# EAGLE board FX I2C MCU v1.1 (EAGLE 6.4)
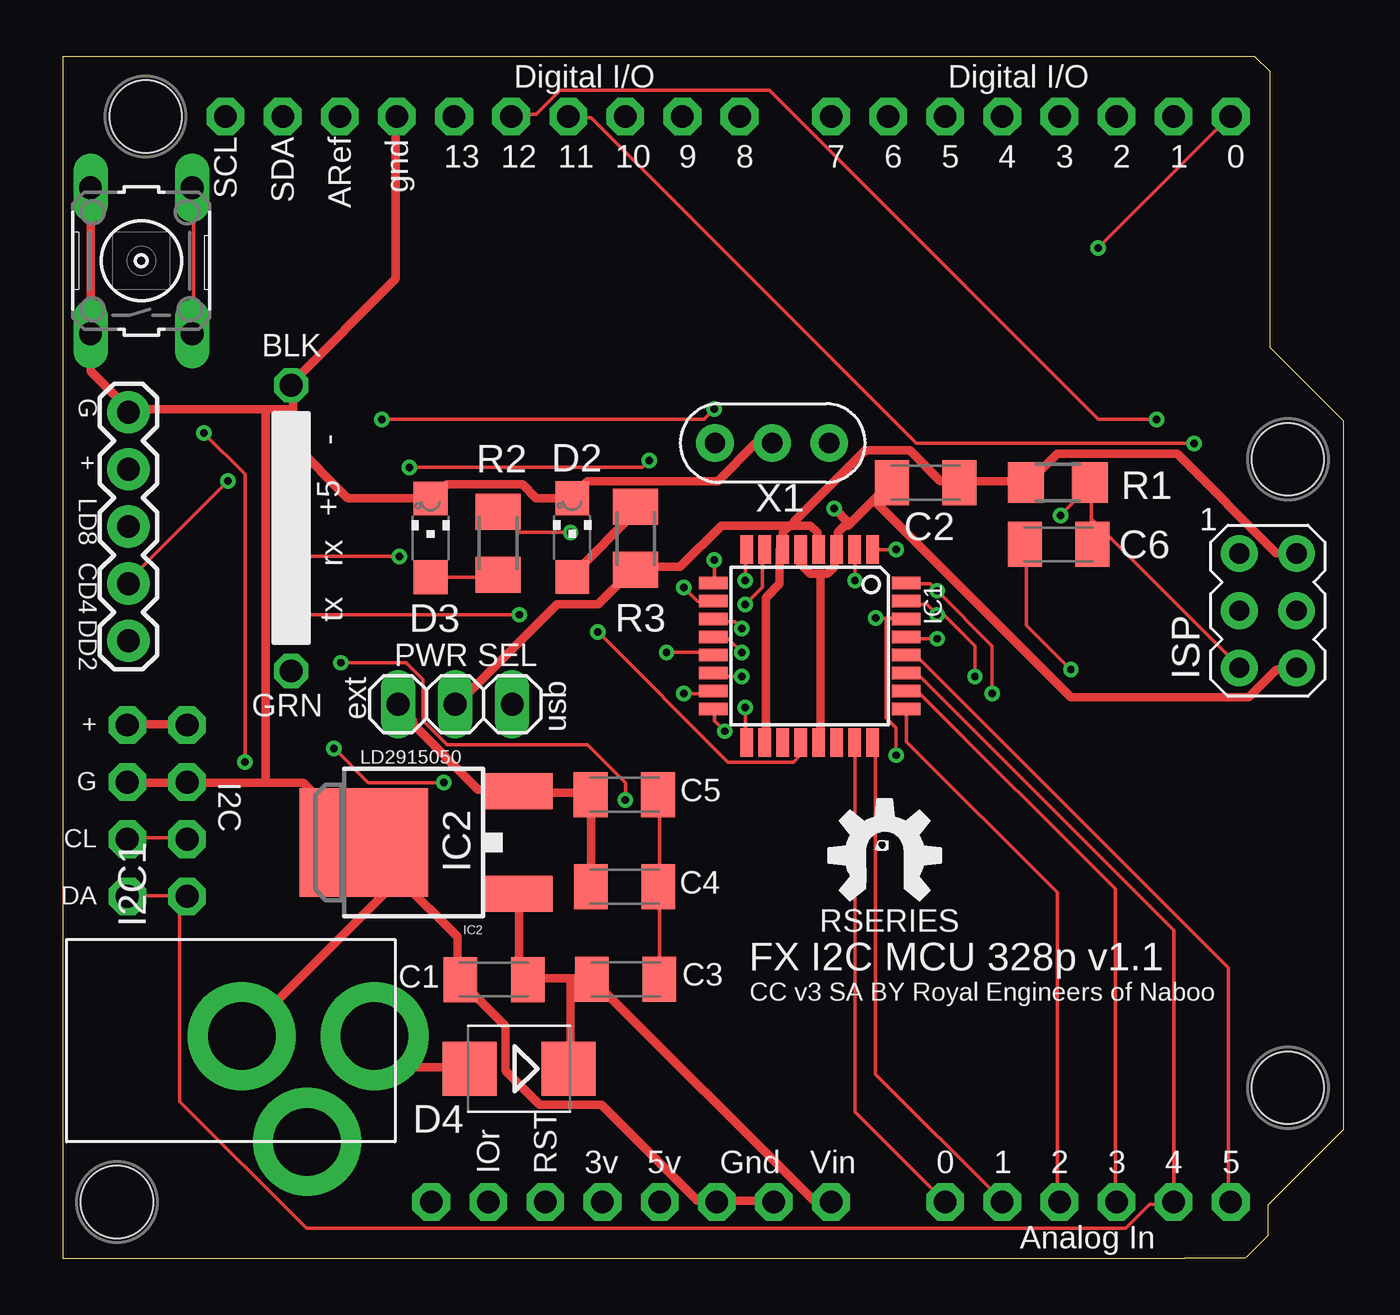
[diagram p0: board, top side]
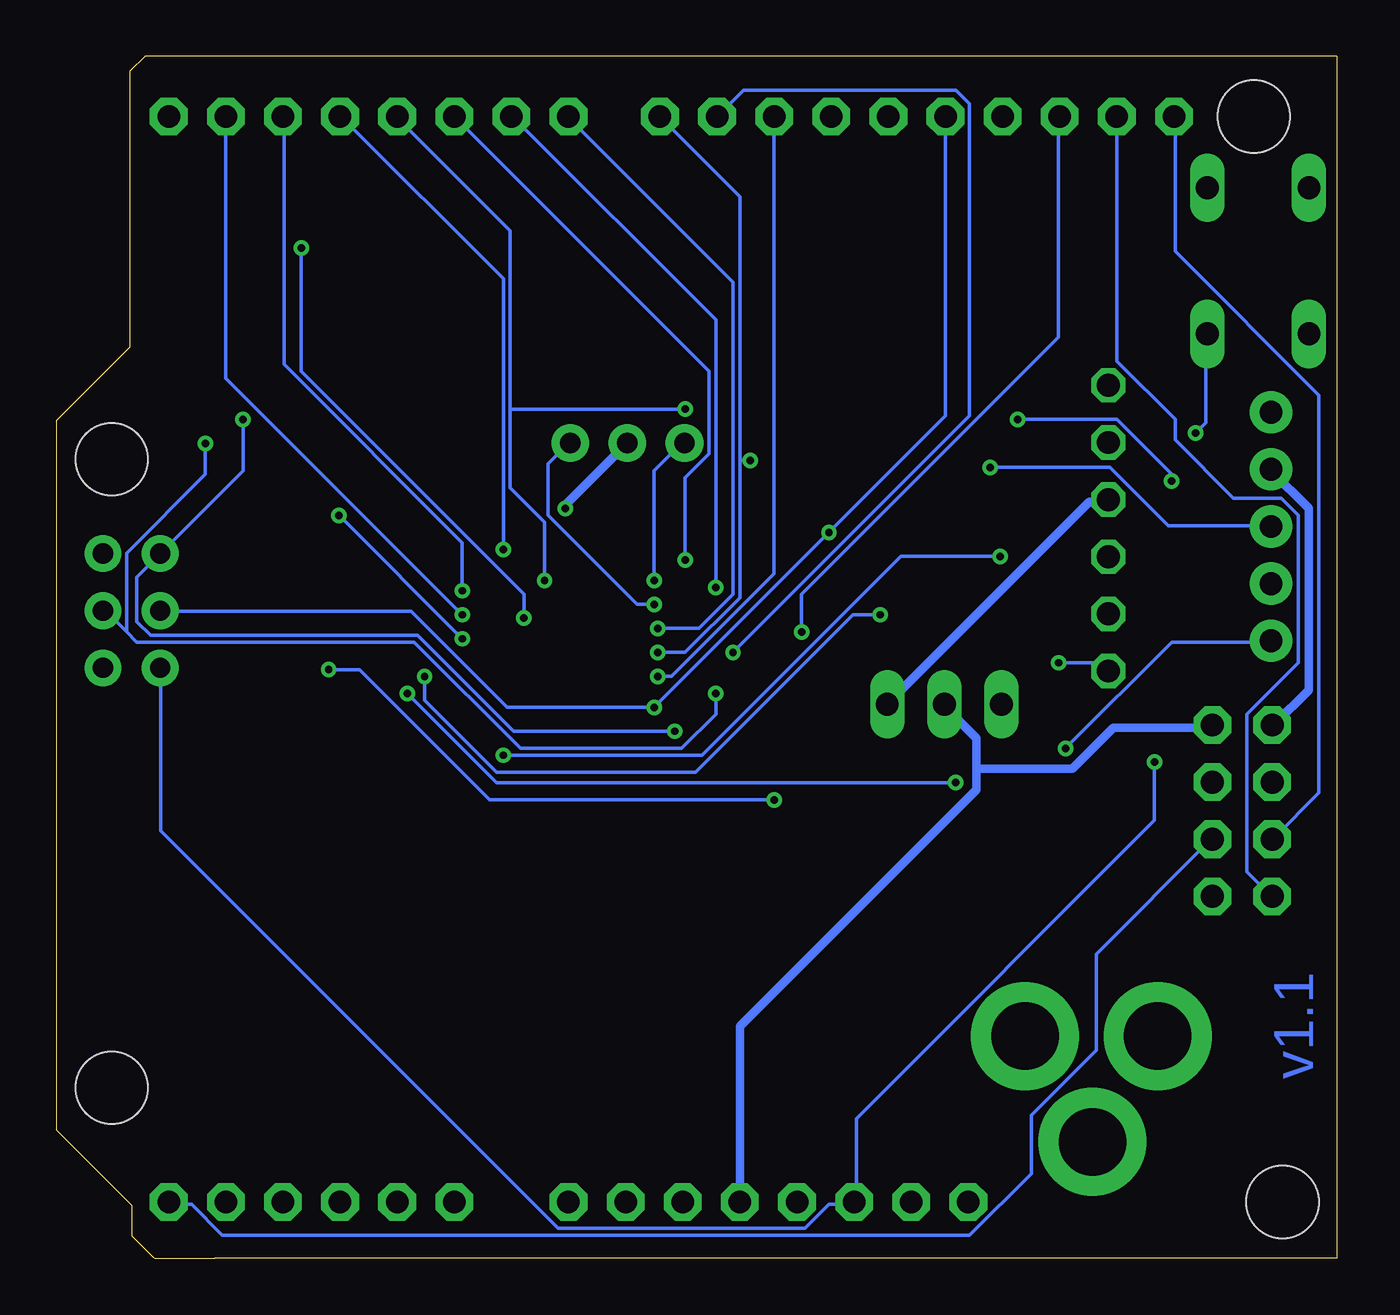
[diagram p1: board, bottom side, seen from below]

Size 56.94 x 53.44 mm. Coordinates in mm from the lower left corner, seen from the top.
Outline: 49.89,0 0,0 0,53.44 52.96,53.44
Outline: 52.95,53.44 52.99,53.44 53.66,52.77 53.66,40.51 56.94,37.24 56.94,5.73 53.58,2.36 53.58,1 52.62,0.05 52.57,0 49.89,0
Copper layers (1*16): Top 0.0356mm / dielectric 1.5011mm / Bottom 0.0356mm
Design rules "LaenPCBOrder": minimum track width 6mil, minimum drill 13mil, track to track 6mil, track to pad 6mil, pad to pad 6mil, via to via 12mil, smd to smd 6mil, copper to edge 15mil, drill to drill 6mil, minimum pad ring 7mil, minimum via ring 7mil, stop-mask expansion 4mil, vias tented up to drill 0mil, thermal gap 10mil
Net classes: 1 supply: width 0.381 mm, drill 0.152 mm, clearance 0.152 mm
Holes 3.2 mm at 3.68,50.76 54.48,35.52 54.48,7.58 2.41,2.5

## Footprints (pad centres in the part's own frame; a part is rotated, then mirrored left to right if it is on the bottom)
C1206K = smd 1.5 x 2: 1 -1.5,0; 2 1.5,0
CHIPLED_1206 = smd 1.5 x 1.5: A 0,-1.75; C 0,1.75
SMB = smd 2.4 x 2.4: A 2.2,0; C -2.2,0
1X04-CB = drill 1.016 pad 1.676 octagon: 1 -3.81,0; 2 -1.27,0; 3 1.27,0; 4 3.81,0
TQFP32-08 = smd 1.27 x 0.559: 1 -4.293,2.8; 2 -4.293,2; 3 -4.293,1.2; 4 -4.293,0.4; 5 -4.293,-0.4; 6 -4.293,-1.2; 7 -4.293,-2; 8 -4.293,-2.8; 17 4.293,-2.8; 18 4.293,-2; 19 4.293,-1.2; 20 4.293,-0.4; 21 4.293,0.4; 22 4.293,1.2; 23 4.293,2; 24 4.293,2.8 | smd 0.559 x 1.27: 9 -2.8,-4.293; 10 -2,-4.293; 11 -1.2,-4.293; 12 -0.4,-4.293; 13 0.4,-4.293; 14 1.2,-4.293; 15 2,-4.293; 16 2.8,-4.293; 25 2.8,4.293; 26 2,4.293; 27 1.2,4.293; 28 0.4,4.293; 29 -0.4,4.293; 30 -1.2,4.293; 31 -2,4.293; 32 -2.8,4.293
DPAK = smd 1.6 x 3: 1 -2.28,-5.31; 3 2.28,-5.31 | smd 4.826 x 5.715: 4 0,1.588
AVRISP = drill 0.9 pad 1.626: 1 -1.27,2.54; 2 1.27,2.54; 3 -1.27,0; 4 1.27,0; 5 -1.27,-2.54; 6 1.27,-2.54
PJ-102A = drill 3 pad 4.8: RING 0.1,-3.39; RING_SW -4.6,-6.29; TIP 0.1,-9.29
1X06-CLEAN = drill 1.016 octagon: 1 -6.35,0; 2 -3.81,0; 3 -1.27,0; 4 1.27,0; 5 3.81,0; 6 6.35,0
1X03 = drill 1.016 long: 1 -2.54,0; 2 0,0; 3 2.54,0
R1206 = smd 1.6 x 1.803: 1 -1.422,0; 2 1.422,0
M1206 = smd 1.6 x 2: 1 -1.4,0; 2 1.4,0
B3F-10XX = drill 1.016 long: 1 -3.251,2.261; 2 3.251,2.261; 3 -3.251,-2.261; 4 3.251,-2.261
1X05 = drill 1.016 pad 1.88: 1 0,0; 2 2.54,0; 3 5.08,0; 4 7.62,0; 5 10.16,0
ARDUINOR3-PINSONLY = drill 1 pad 1.676 octagon: 3V 36.83,3.81; 5V 39.37,3.81; A0 52.07,3.81; A1 54.61,3.81; A2 57.15,3.81; A3 59.69,3.81; A4 62.23,3.81; A5 64.77,3.81; AREF 25.146,52.07; D0 64.77,52.07; D1 62.23,52.07; D2 59.69,52.07; D3 57.15,52.07; D4 54.61,52.07; D5 52.07,52.07; D6 49.53,52.07; D7 46.99,52.07; D8 42.926,52.07; D9 40.386,52.07; D10 37.846,52.07; D11 35.306,52.07; D12 32.766,52.07; D13 30.226,52.07; GND 27.686,52.07; GND1 44.45,3.81; GND2 41.91,3.81; IOREF 31.75,3.81; RESERVED 29.21,3.81; RESET 34.29,3.81; SCL 20.066,52.07; SDA 22.606,52.07; VIN 46.99,3.81
CERM_OSC = drill 0.9 pad 1.676: P$1 -2.54,0; P$2 0,0; P$3 2.54,0

## Placement (x,y rotation side)
C1  0.1uF  [C1206K]  19.17,12.4 180 top
C2  0.1uF  [C1206K]  38.37,34.48 180 top
C3  10uf 25V  [C1206K]  25.03,12.41 0 top
C4  10uf 25V  [C1206K]  24.98,16.52 0 top
C5  0.1uF  [C1206K]  24.96,20.61 0 top
C6  0.1uF  [C1206K]  44.28,31.74 0 top
D2  [CHIPLED_1206]  22.65,32.04 0 top
D3  Green  [CHIPLED_1206]  16.35,32.03 0 top
D4  [SMB]  20.29,8.43 180 top
I2C  [1X04-CB]  2.87,19.9 90 top
I2C1  [1X04-CB]  5.52,19.9 90 top
IC1  MEGA48/88/168-AU  [TQFP32-08]  33.21,27.22 270 top
IC2  LM2931_FIXED  [DPAK]  14.97,18.49 90 top
ISP  AVRISP-6  [AVRISP]  53.59,28.79 0 top
J2  2.1MMJACK  [PJ-102A]  4.57,9.78 90 top
JP7  [1X06-CLEAN]  10.16,32.46 270 top
PWR_SEL  [1X03]  17.44,24.64 0 top
R1  10K  [R1206]  44.25,34.49 0 top
R2  1.0 K  [M1206]  19.35,31.8 270 top
R3  1.0 K  [M1206]  25.47,32 90 top
S1  RESET  [B3F-10XX]  3.49,44.35 90 top
TEECES  [1X05]  2.92,27.46 90 top
U1  ARDUINOR3PINSONLY  [ARDUINOR3-PINSONLY]  -12.83,-1.31 0 top
U$2  RSERIES-OSHW-LOGOMEDIUM  [RSERIES-OSHW-LOGO-MEDIUM]  36.45,17.96 0 top
X1  16.00MHz  [CERM_OSC]  31.54,36.25 180 top

## Library data of the parts
C1 C2 C5 C6 D2 D3 J2 R2 R3 = minimidi
C3 C4 = rcl
D4 = diode
I2C I2C1 JP7 = carduino
IC1 = avr-7
IC2 = SparkFun-PowerIC
ISP = adafruit
PWR_SEL = pinhead
R1 = rcl-ez
S1 = switch-omron
TEECES = SparkFun-Connectors
U1 U$2 = rseries
X1 = digg

## Nets
+5V [supply]: C2.1 I2C1.4 I2C.4 IC1.4 IC1.6 IC1.18 ISP.2 PWR_SEL.2 R1.1 R3.1 TEECES.4 U1.5V
+9V [supply]: C1.1 C3.1 D4.C IC2.1 U1.VIN
ANALOG0: IC1.23 U1.A0
ANALOG1: IC1.24 U1.A1
ANALOG2: IC1.25 U1.A2
ANALOG3: IC1.26 U1.A3
ANALOG4: I2C1.1 I2C.1 IC1.27 U1.A4 U1.SDA
ANALOG5: I2C1.2 I2C.2 IC1.28 U1.A5 U1.SCL
AREF: IC1.20 U1.AREF
DIGITAL2: IC1.32 TEECES.1 U1.D2
DIGITAL3: IC1.1 U1.D3
DIGITAL4: IC1.2 TEECES.2 U1.D4
DIGITAL5: IC1.9 U1.D5
DIGITAL6: IC1.10 U1.D6
DIGITAL7: IC1.11 U1.D7
DIGITAL8: IC1.12 TEECES.3 U1.D8
DIGITAL9: IC1.13 U1.D9
DIGITAL10: IC1.14 U1.D10
GND [supply]: C1.2 C2.2 D2.C D3.C I2C1.3 I2C.3 IC1.3 IC1.5 IC1.21 IC2.4 ISP.6 J2.RING JP7.1 JP7.2 S1.1 S1.2 TEECES.5 U1.GND U1.GND1 U1.GND2 X1.P$2
MISO: IC1.16 ISP.1 U1.D12
MOSI: IC1.15 ISP.4 U1.D11
N$1: IC1.7 X1.P$1
N$2: IC1.8 X1.P$3
N$3 [supply]: D2.A R3.2
N$4: D3.A R2.2
N$5: U1.RESERVED
N$6 [supply]: D4.A J2.TIP
N$7: U1.IOREF
N$8: C3.2 C4.2 C5.2
N$9 [supply]: C4.1 C5.1 IC2.3 PWR_SEL.1
N$11: U1.3V
RST: C6.2 IC1.29 ISP.5 R1.2 S1.3 S1.4 U1.RESET
RTS#: C6.1 JP7.6
RXD: IC1.30 JP7.4 U1.D0
SCK: IC1.17 ISP.3 R2.1 U1.D13
TXD: IC1.31 JP7.5 U1.D1
USB_5V [supply]: JP7.3 PWR_SEL.3

## Tracks (layer width: path | path; a pad name or v marks a point on that pad's centre or on a via)
+5V
  Top 0.381: I2C.4 2.92,23.74 5.51,23.74 I2C1.4 | IC1.18 31.26,22.97 31.26,29.38 31.87,29.98 31.87,31.51 IC1.6 32.02,31.66 32.02,32.27 32.33,32.58 | 32.33,32.58 32.48,32.58 | 32.48,32.58 33.24,32.58 33.55,32.27 33.55,31.51 IC1.4 | 32.33,32.58 32.18,32.58 29.28,32.58 27.45,30.75 25.47,30.75 R3.1 25.32,30.59 23.79,29.07 21.97,29.07 17.55,24.65 PWR_SEL.2 | 32.48,32.58 32.48,32.73 35.68,35.93 37.66,35.93 39.04,34.56 39.8,34.56 C2.1 39.95,34.56 42.69,34.56 R1.1 43,34.56 44.22,35.78 49.55,35.78 53.97,31.36 54.73,31.36 ISP.2
  Bottom 0.381: TEECES.4 2.92,35.01 1.24,33.34 1.24,25.26 2.76,23.74 I2C.4 | 16.02,21.75 16.02,23.13 17.39,24.5 PWR_SEL.2 | 16.02,21.75 16.02,20.84 26.54,10.32 26.54,2.55 U1.5V | I2C1.4 5.66,23.58 9.93,23.58 11.76,21.75 15.87,21.75 16.02,21.75
+9V
  Top 0.381: 22.58,12.46 23.49,12.46 C3.1 23.64,12.31 33.4,2.55 34.16,2.55 U1.VIN | 22.58,12.46 20.75,12.46 C1.1 20.75,12.61 20.29,13.07 20.29,16.12 IC2.1 | D4.C 22.58,8.5 22.58,12.31 22.58,12.46
ANALOG0
  Top 0.152: IC1.23 35.23,22.82 35.23,6.51 39.19,2.55 U1.A0
ANALOG1
  Top 0.152: IC1.24 36.14,22.82 36.14,8.19 41.78,2.55 U1.A1
ANALOG2
  Top 0.152: IC1.25 37.51,24.35 37.51,22.97 44.22,16.27 44.22,2.55 U1.A2
ANALOG3
  Top 0.152: IC1.26 37.51,25.11 38.12,25.11 46.81,16.42 46.81,2.55 U1.A3
ANALOG4
  Top 0.152: IC1.27 37.51,25.87 38.12,25.87 49.4,14.59 49.4,2.55 U1.A4 49.4,2.4 48.33,2.4 47.26,1.33 10.84,1.33 5.2,6.97 5.2,16.12 | 5.2,16.12 5.51,16.12 I2C1.1 5.2,16.12 | 5.2,16.12 2.92,16.12 I2C.1
  Bottom 0.152: U1.SDA 9.77,50.71 9.77,39.89 7.18,37.3 7.18,36.39 4.59,33.8 2.46,33.8 1.7,33.03 1.7,26.48 3.98,24.19 3.98,17.18 2.92,16.12 I2C.1
ANALOG5
  Top 0.152: IC1.28 37.51,26.78 37.97,26.78 51.84,12.92 51.84,2.55 U1.A5 | I2C.2 2.92,18.71 5.51,18.71 I2C1.2
  Bottom 0.152: U1.SCL 7.18,50.71 7.18,44.77 0.78,38.37 0.78,20.69 2.76,18.71 I2C.2 | U1.A5 51.84,2.4 50.92,2.4 49.55,1.03 16.33,1.03 13.58,3.77 13.58,6.36 10.69,9.26 10.69,13.53 5.66,18.55 I2C1.2
AREF  (via drill 0.33)
  Top 0.152: v23.79,27.85 29.59,22.06 32.48,22.06 32.79,22.36 32.79,22.82 IC1.20
  Bottom 0.152: v23.79,27.85 23.79,29.53 12.37,40.96 12.37,50.71 U1.AREF
DIGITAL2  (via drill 0.33)
  Top 0.152: IC1.32 37.51,29.98 38.58,29.98 v38.88,29.68 41.32,27.24 v41.32,25.11 | v12.06,22.67 13.58,21.15 v16.94,21.15
  Bottom 0.152: v38.88,29.68 38.88,31.81 46.81,39.74 46.81,50.71 U1.D2 | v12.06,22.67 7.34,27.39 2.92,27.39 TEECES.1 | v16.94,21.15 37.36,21.15 v41.32,25.11
DIGITAL3  (via drill 0.33)
  Top 0.152: v37.05,31.51 36.14,31.51 IC1.1
  Bottom 0.152: v37.05,31.51 37.05,43.55 44.22,50.71 U1.D3
DIGITAL4  (via drill 0.33)
  Top 0.152: v35.23,30.14 35.23,31.51 IC1.2 | v7.34,34.56 2.92,30.14 TEECES.2 | v14.19,37.3 28.52,37.3 v28.98,37.76
  Bottom 0.152: v35.23,30.14 35.23,32.73 36.75,34.25 36.75,37.76 | 36.75,37.76 36.75,45.68 41.78,50.71 U1.D4 | v7.34,34.56 7.34,34.86 9.77,37.3 v14.19,37.3 | 36.75,37.76 v28.98,37.76
DIGITAL5  (via drill 0.33)
  Top 0.152: v28.98,31.05 28.98,30.14 IC1.9
  Bottom 0.152: v28.98,31.05 28.98,34.71 27.91,35.78 27.91,39.43 39.19,50.71 U1.D5
DIGITAL6  (via drill 0.33)
  Top 0.152: v27.6,29.83 28.21,29.22 28.82,29.22 IC1.10
  Bottom 0.152: v27.6,29.83 27.6,41.72 36.6,50.71 U1.D6
DIGITAL7  (via drill 0.33)
  Top 0.152: v30.2,28 29.89,28.31 28.98,28.31 IC1.11
  Bottom 0.152: v30.2,28 28.37,28 26.84,29.53 26.84,43.4 34.16,50.71 U1.D7
DIGITAL8  (via drill 0.33)
  Top 0.152: v30.2,26.94 29.59,27.55 28.98,27.55 IC1.12 | v15.41,35.17 25.78,35.17 v26.08,35.47
  Bottom 0.152: v30.2,26.94 28.98,26.94 26.54,29.38 26.54,35.47 | 26.54,35.47 26.54,47.21 30.04,50.71 U1.D8 | v15.41,35.17 10.08,35.17 7.49,32.58 2.92,32.58 TEECES.3 | 26.54,35.47 v26.08,35.47
DIGITAL9  (via drill 0.33)
  Top 0.152: v26.84,26.94 28.82,26.94 IC1.13
  Bottom 0.152: v26.84,26.94 16.33,37.45 16.33,51.32 16.94,51.93 26.39,51.93 27.45,50.86 U1.D9
DIGITAL10  (via drill 0.33)
  Top 0.152: v30.2,25.87 28.98,25.87 IC1.14
  Bottom 0.152: v30.2,25.87 29.59,25.87 25.01,30.44 25.01,50.71 U1.D10
GND  (via drill 0.33)
  Top 0.381: I2C.3 2.92,21.15 5.51,21.15 I2C1.3 5.66,21.15 9.01,21.15 | U1.GND1 31.57,2.55 29.13,2.55 U1.GND2 28.98,2.55 28.21,2.55 23.95,6.82 21.2,6.82 19.68,8.34 19.68,10.32 17.7,12.31 C1.2 17.55,12.46 17.55,14.29 14.96,16.88 | 14.96,16.88 13.43,18.4 IC2.4 | 9.01,21.15 10.69,21.15 13.28,18.55 IC2.4 | 14.96,16.88 8.1,10.02 J2.RING | 14.96,16.88 IC2.4 | ISP.6 54.88,26.33 ISP.6 | IC1.5 32.79,31.51 IC1.5 | 33.7,30.44 34.01,30.44 34.31,30.75 34.31,31.51 IC1.3 | 33.7,30.44 33.24,30.44 32.79,30.9 32.79,31.36 IC1.5 | IC1.21 33.7,22.97 33.7,30.29 33.7,30.44 | IC1.3 34.46,31.51 IC1.3 | 35,32.65 34.92,32.58 34.77,32.58 34.46,32.27 34.46,31.66 IC1.3 | 35,32.65 36.75,34.4 C2.2 36.14,33.64 44.83,24.96 52.75,24.96 53.97,26.18 54.73,26.18 ISP.6 | v34.31,33.34 34.92,32.73 35,32.65 | S1.2 1.24,47.51 1.24,41.26 S1.1 1.24,40.96 1.24,39.43 2.92,37.76 TEECES.5 3.07,37.76 9.01,37.76 | 10.23,37.76 10.23,36.39 JP7.2 10.23,36.23 12.67,33.8 16.33,33.8 D3.C 16.48,33.8 17.09,34.4 20.44,34.4 21.05,33.8 22.58,33.8 D2.C 22.73,33.95 23.34,34.56 29.13,34.56 30.8,36.23 31.41,36.23 X1.P$2 | 10.23,37.76 10.23,38.67 JP7.1 10.23,38.98 14.8,43.55 14.8,50.71 U1.GND | 9.01,37.76 10.08,37.76 10.23,37.76 | 9.01,21.15 9.01,21.3 9.01,37.61 9.01,37.76
  Bottom 0.381: v34.31,33.34 34.31,33.49 31.57,36.23 X1.P$2
MISO  (via drill 0.33)
  Top 0.152: v29.43,23.43 28.98,23.89 28.98,24.35 IC1.16 | v48.64,37.3 46.05,37.3 31.41,51.93 22.12,51.93 21.05,50.86 19.98,50.86 U1.D12
  Bottom 0.152: v29.43,23.43 36.6,23.43 40.86,27.7 52.75,27.7 53.36,28.31 53.36,30.29 52.45,31.2 ISP.1 52.29,31.36 48.64,35.01 v48.64,37.3
MOSI  (via drill 0.33)
  Top 0.152: v27.6,25.11 28.82,25.11 IC1.15 | v50.31,36.23 37.97,36.23 23.49,50.71 22.58,50.71 U1.D11
  Bottom 0.152: v27.6,25.11 27.6,24.19 29.13,22.67 36.29,22.67 41.02,27.39 53.36,27.39 53.82,27.85 | 53.82,27.85 54.73,28.77 ISP.4 | v50.31,36.23 50.31,34.86 53.82,31.36 53.82,27.85
N$1  (via drill 0.33)
  Top 0.152: v30.35,29.07 31.11,29.83 31.11,31.51 IC1.7
  Bottom 0.152: v30.35,29.07 31.11,29.07 35.07,33.03 35.07,35.32 34.16,36.23 X1.P$1
N$2  (via drill 0.33)
  Top 0.152: v30.35,30.14 30.35,31.51 IC1.8
  Bottom 0.152: v30.35,30.14 30.35,35.01 29.13,36.23 X1.P$3
N$3
  Top 0.381: D2.A 22.73,30.44 25.47,33.19 25.47,33.34 R3.2
N$4
  Top 0.152: D3.A 16.48,30.29 19.22,30.29 R2.2
N$6
  Top 0.381: D4.A 18,8.5 15.26,8.5 13.89,9.87 J2.TIP
N$8
  Top 0.152: C3.2 26.54,12.46 26.54,16.42 C4.2 26.54,16.57 26.54,20.54 C5.2
N$9
  Top 0.381: C4.1 23.49,16.57 23.49,20.54 C5.1 23.34,20.69 20.29,20.69 IC2.3 20.14,20.84 18.46,20.84 15.56,23.74 15.56,23.89 14.96,24.5 PWR_SEL.1
RST  (via drill 0.33)
  Top 0.152: S1.3 5.81,41.11 5.81,47.51 S1.4 | v38.88,27.55 37.51,27.55 IC1.29 | 45.74,34.4 v44.37,33.03 | 45.74,34.4 R1.2 45.74,34.4 | 45.74,34.4 45.74,32.88 | 45.74,32.88 45.74,31.81 C6.2 | 45.74,32.88 52.29,26.33 ISP.5 | v6.27,36.69 8.1,34.86 v8.1,22.06
  Bottom 0.152: v44.37,33.03 v38.88,27.55 | ISP.5 52.29,26.18 52.29,19.01 34.62,1.33 23.64,1.33 22.58,2.4 21.51,2.4 U1.RESET 21.36,2.55 21.36,6.21 8.1,19.47 v8.1,22.06 | v6.27,36.69 5.81,37.15 5.81,40.96 S1.3
RTS#  (via drill 0.33)
  Top 0.152: v44.83,26.18 42.84,28.16 42.84,31.66 C6.1 | v25.01,20.38 25.01,21.15 23.34,22.82 17.09,22.82 16.02,23.89 16.02,25.72 15.26,26.48 v12.37,26.48
  Bottom 0.152: v44.83,26.18 43.45,26.18 37.66,20.38 v25.01,20.38 | v12.37,26.48 10.54,26.48 10.23,26.18 JP7.6
RXD  (via drill 0.33)
  Top 0.152: v36.14,28.46 36.6,28.46 | 36.6,28.46 37.36,28.46 IC1.30 | v46.05,44.92 51.84,50.71 U1.D0 | v14.96,31.2 10.23,31.2 JP7.4 | v37.05,22.36 37.05,23.58 36.6,24.04 36.6,28.46
  Bottom 0.152: v36.14,28.46 36.14,29.53 46.05,39.43 v46.05,44.92 | v14.96,31.2 19.38,31.2 28.21,22.36 v37.05,22.36
SCK  (via drill 0.33)
  Top 0.152: v30.35,24.5 30.35,22.97 IC1.17 | v22.58,32.27 20.29,32.27 19.38,33.19 R2.1
  Bottom 0.152: ISP.3 52.29,28.77 41.17,28.77 36.9,24.5 v30.35,24.5 v22.58,32.27 17.39,37.45 17.39,50.71 U1.D13
TXD  (via drill 0.33)
  Top 0.152: IC1.31 37.51,29.07 38.43,29.07 v38.88,28.61 39.19,28.61 40.56,27.24 v40.56,25.87 | v20.29,28.61 10.23,28.61 JP7.5
  Bottom 0.152: v38.88,28.61 49.4,39.13 49.4,50.71 U1.D1 | v20.29,28.61 21.51,28.61 28.52,21.6 37.36,21.6 40.56,24.8 v40.56,25.87
USB_5V
  Bottom 0.381: PWR_SEL.3 10.99,33.64 10.23,33.64 JP7.3

## Text on the board
Bottom: v1.1
tPlace: BLK | - | R2 | D2 | +5 | X1 | rx | tx | D3 | R3 | ext | PWR SEL | GRN | usb | IC2
_tsilk: G | + | LD8 | R1 | C2 | CD4 | C6 | DD2 | + | G | LD2915050 | CL | DA | RSERIES | FX I2C MCU 328p v1.1 | CC v3 SA BY Royal Engineers of Naboo